# EAGLE board controller testjig (EAGLE 7.1.0)
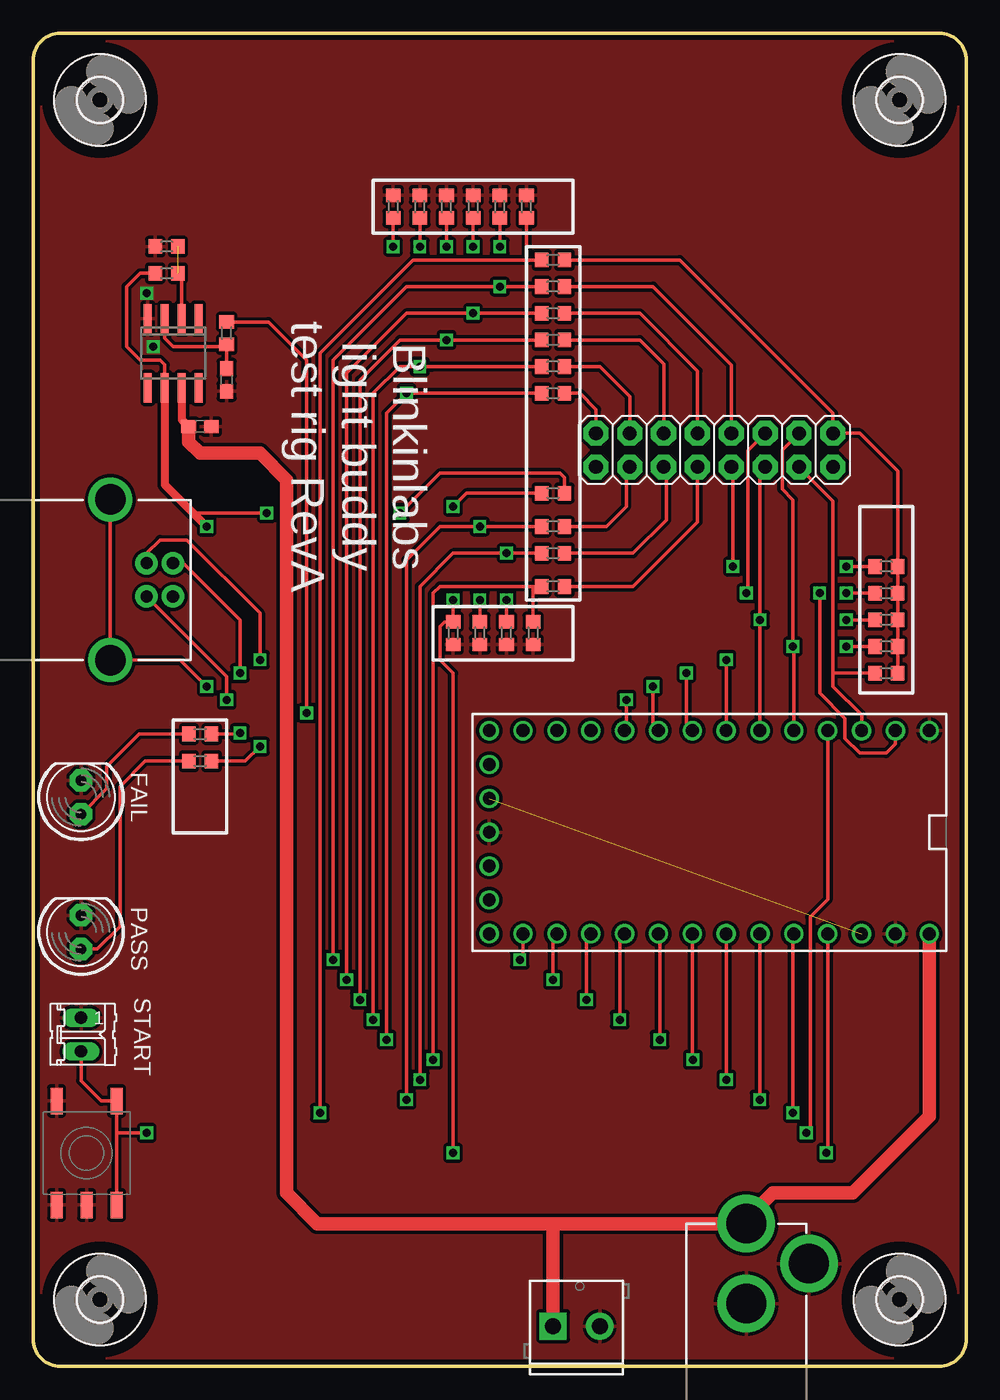
[diagram p0: board, top side]
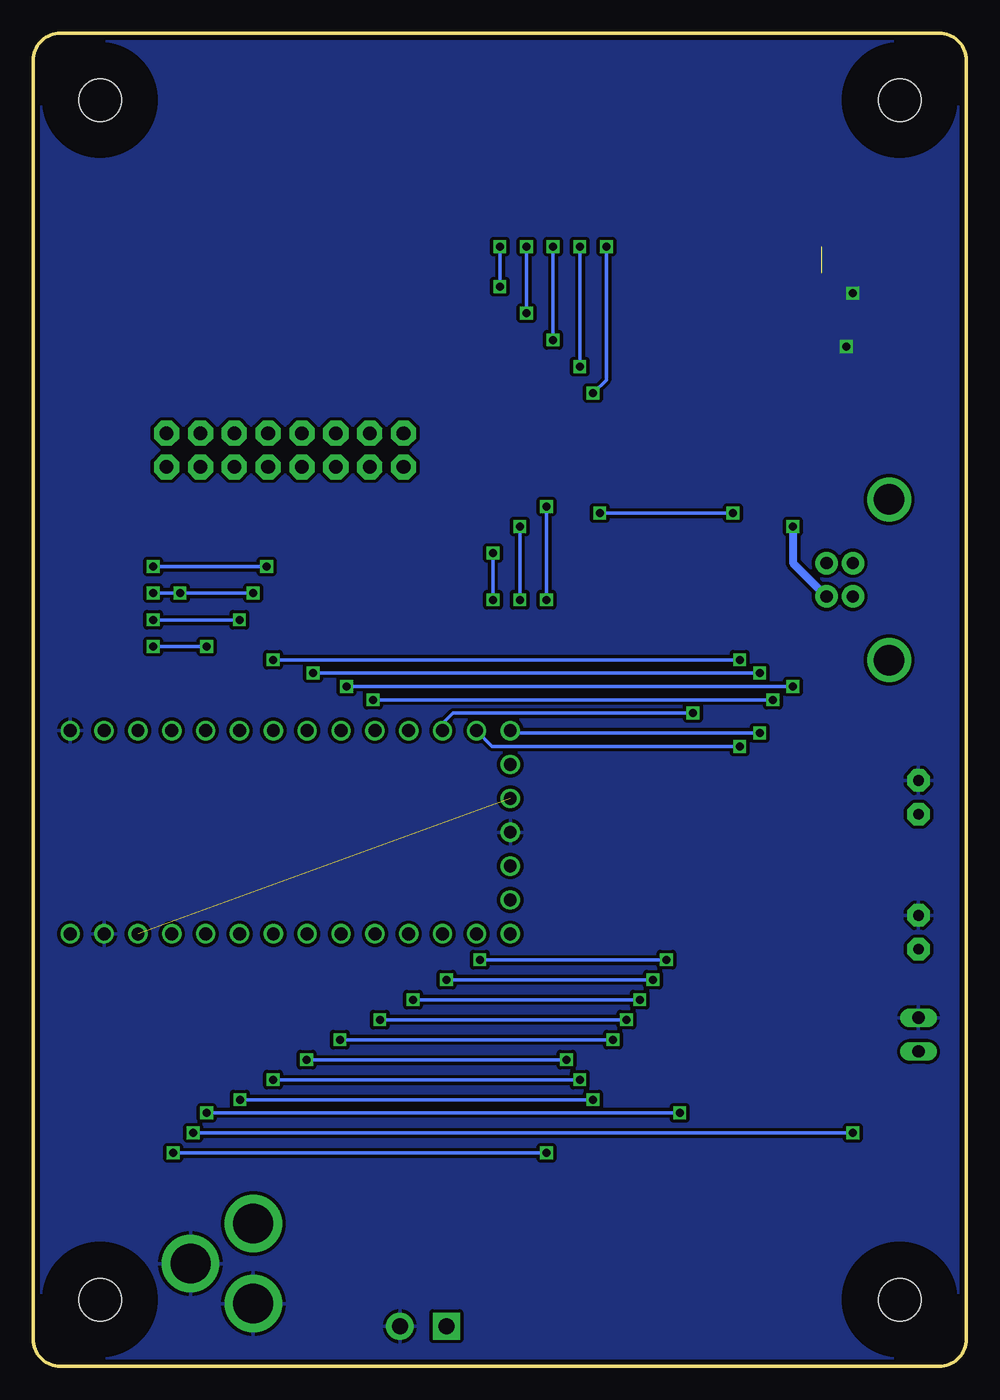
[diagram p1: board, bottom side, seen from below]

Size 70 x 100 mm. Coordinates in mm from the lower left corner, seen from the top.
Outline: 0,98 0,2 arc90 2,0 68,0 arc90 70,2 70,98 arc90 68,100 2,100 arc90 0,98
Copper layers (1*16): Top 0.0356mm / dielectric 1.5011mm / Bottom 0.0356mm
Design rules "BlinkyTape": minimum track width 8mil, minimum drill 10mil, track to track 8mil, track to pad 8mil, pad to pad 8mil, via to via 8mil, smd to smd 8mil, copper to edge 15mil, drill to drill 0.25mm, minimum pad ring 7mil, minimum via ring 7mil, stop-mask expansion 2mil, vias tented up to drill 10mil, thermal gap 10mil

## Footprints (pad centres in the part's own frame; a part is rotated, then mirrored left to right if it is on the bottom)
C0603 = smd 1.1 x 1: 1 -0.85,0; 2 0.85,0
LED5MM = drill 0.813 pad 1.676 octagon: A -1.27,0; K 1.27,0
3,2 = hole 3.2: 0,0
SO8 = smd 0.6 x 2.2: 1 -1.905,-2.6; 2 -0.635,-2.6; 3 0.635,-2.6; 4 1.905,-2.6; 5 1.905,2.6; 6 0.635,2.6; 7 -0.635,2.6; 8 -1.905,2.6
POWER_JACK_PTH = drill 2.997 pad 4.318: GND 0,7.7; GNDBREAK 4.7,10.7; PWR 0,13.7
SCREWTERMINAL-3.5MM-2 = drill 1.2 pad 2.032 square: 1 0,0 | drill 1.2 pad 2.032: 2 3.5,0
R0603 = smd 1 x 1.1: 1 -0.85,0; 2 0.85,0
02P = drill 0.914 long: 1 -1.27,0; 2 1.27,0
TD-07XB = smd 2 x 0.9: 1 -3.9,-2.25; 2 3.9,-2.25; 3 -3.9,2.25; 4 3.9,2.25; 5 -3.9,0
TEENSY_3.0_BASIC = drill 0.965: 0 -7.62,13.97; 1 -7.62,11.43; 2 -7.62,8.89; 3 -7.62,6.35; 3.3V 7.62,11.43; 3.3V1 -2.54,-16.51; 4 -7.62,3.81; 5 -7.62,1.27; 6 -7.62,-1.27; 7 -7.62,-3.81; 8 -7.62,-6.35; 9 -7.62,-8.89; 10 -7.62,-11.43; 11 -7.62,-13.97; 12 -7.62,-16.51; 13 7.62,-16.51; 14/A0 7.62,-13.97; 15/A1 7.62,-11.43; 16/A2 7.62,-8.89; 17/A3 7.62,-6.35; 18/A4 7.62,-3.81; 19/A5 7.62,-1.27; 20/A6 7.62,1.27; 21/A7 7.62,3.81; 22/A8 7.62,6.35; 23/A9 7.62,8.89; AGND 7.62,13.97; GND -7.62,16.51; GND1 0,-16.51; PGM 2.54,-16.51; RESET 5.08,-16.51; VBAT -5.08,-16.51; VIN 7.62,16.51
2X8 = drill 1.016 pad 1.88 octagon: 1 0,0; 2 0,2.54; 3 2.54,0; 4 2.54,2.54; 5 5.08,0; 6 5.08,2.54; 7 7.62,0; 8 7.62,2.54; 9 10.16,0; 10 10.16,2.54; 11 12.7,0; 12 12.7,2.54; 13 15.24,0; 14 15.24,2.54; 15 17.78,0; 16 17.78,2.54
USB-B-PTH = drill 0.914 pad 1.676: D+ 0,1.25; D- 1.981,1.25; GND 0,-1.25; VBUS 1.981,-1.25 | drill 2.286: S1 -2.718,-6.02; S2 -2.718,6.02

## Placement (x,y rotation side)
C1  .1uF  [C0603]  14.5,74 270 top
C2  .1uF  [C0603]  12.5,70.5 0 top
FAIL  RED  [LED5MM]  3.58,42.68 90 top
H1  MOUNT-HOLE3.2  [3,2]  5,5 0 top
H2  MOUNT-HOLE3.2  [3,2]  5,95 0 top
H3  MOUNT-HOLE3.2  [3,2]  65,95 0 top
H4  MOUNT-HOLE3.2  [3,2]  65,5 0 top
IC1  AD8041R  [SO8]  10.5,76 180 top
J1  POWER_JACKPTH  [POWER_JACK_PTH]  53.5,-3 0 top
JP1  [SCREWTERMINAL-3.5MM-2]  39,3 0 top
PASS  GREEN  [LED5MM]  3.58,32.56 90 top
R1  10k  [R0603]  64,54 180 top
R2  10k  [R0603]  64,58 180 top
R3  10k  [R0603]  64,52 180 top
R4  10k  [R0603]  64,56 180 top
R5  10k  [R0603]  64,60 180 top
R6  1k  [R0603]  31,87 90 top
R7  1k  [R0603]  33,87 90 top
R8  1k  [R0603]  35,87 90 top
R9  6.8k  [R0603]  39,81 0 top
R10  6.8k  [R0603]  39,79 0 top
R11  6.8k  [R0603]  39,77 0 top
R12  1k  [R0603]  37.5,55 270 top
R13  6.8k  [R0603]  39,58.5 180 top
R14  1k  [R0603]  29,87 90 top
R15  1k  [R0603]  27,87 90 top
R16  6.8k  [R0603]  39,75 0 top
R17  6.8k  [R0603]  39,73 0 top
R18  1k  [R0603]  33.5,55 270 top
R19  6.8k  [R0603]  39,63 180 top
R20  6.8k  [R0603]  39,61 180 top
R21  6.8k  [R0603]  39,65.5 180 top
R22  1k  [R0603]  31.5,55 270 top
R23  1k  [R0603]  35.5,55 270 top
R24  6.8k  [R0603]  39,83 0 top
R25  1k  [R0603]  37,87 90 top
R26  68k  [R0603]  10,82 180 top
R27  68k  [R0603]  10,84 0 top
R28  68k  [R0603]  14.5,77.5 270 top
R33  330  [R0603]  12.52,45.39 0 top
R34  330  [R0603]  12.52,47.43 0 top
START  [02P]  3.58,24.88 270 top
SW2  BUTTON_2  [TD-07XB]  4,16 90 top
U$1  TEENSY_3.0_BASIC  [TEENSY_3.0_BASIC]  50.72,40.06 270 top
U$2  M08X2  [2X8]  60,70 180 top
U$3  USB+SHIELD  [USB-B-PTH]  8.5,59 0 top

## Library data of the parts
C1 C2 FAIL PASS R1-R28 R33 R34 = adafruit
H1-H4 = holes
IC1 = analog-devices; MF: ALTERA CORPORATION; MPN: AD8041ARZ; OC_FARNELL: 1464831; OC_NEWARK: 88H0130
J1 JP1 U$2 U$3 = SparkFun-Connectors
START = con-amp-quick; OC_FARNELL: unknown; OC_NEWARK: unknown
SW2 = blinkinlabs
U$1 = Teensy3.0

## Nets
3.3V: U$1.3.3V U$1.3.3V1
+5V: C2.1 IC1.7 J1.PWR JP1.1 U$1.VIN
FAIL_LED: R34.2 U$1.12
GND: C1.2 C2.2 FAIL.K IC1.4 J1.GND J1.GNDBREAK JP1.2 PASS.K R6.2 R7.2 R8.2 R12.2 R14.2 R15.2 R18.2 R22.2 R23.2 R25.2 R27.1 START.1 SW2.3 SW2.4 SW2.5 U$1.AGND U$1.GND U$1.GND1
GOOD: PASS.A R33.1
N$1: IC1.2 R26.1 R27.2
N$3: C1.1 IC1.3 R28.2
N$24: R20.1 U$2.12
N$52: FAIL.A R34.1
PASS_LED: R33.2 U$1.11
START_SW: START.2 SW2.1 SW2.2 U$1.2
TARGET_3V3: R1.1 R2.1 R3.1 R4.1 R5.1 R24.2 U$2.1
TARGET_3V3_MEAS: R24.1 R25.1 U$1.22/A8
TARGET_GND: U$2.2
TARGET_LED_5V: R16.2 U$2.13
TARGET_LED_5V_MEAS: R14.1 R16.1 U$1.17/A3
TARGET_LED_ADDR: R17.2 U$2.15
TARGET_LED_ADDR_MEAS: R15.1 R17.1 U$1.18/A4
TARGET_LED_DATA: R19.1 U$2.14
TARGET_LED_DATA_MEAS: R18.1 R19.2 U$1.21/A7
TARGET_OUT_6: R20.2 R23.1 U$1.20/A6
TARGET_PA4: R9.2 U$2.7
TARGET_PA4_MEAS: R8.1 R9.1 U$1.14/A0
TARGET_PB0: R10.2 U$2.9
TARGET_PB0_MEAS: R7.1 R10.1 U$1.15/A1
TARGET_PB1: R13.1 U$2.10
TARGET_PB1_MEAS: R12.1 R13.2 U$1.19/A5
TARGET_PC1: R11.2 U$2.11
TARGET_PC1_MEAS: R6.1 R11.1 U$1.16/A2
TARGET_POWER_EN: R28.1 U$1.10
TARGET_RESET: R5.2 U$2.8
TARGET_RX: R3.2 U$1.1 U$2.4
TARGET_TCLK: R1.2 U$1.3 U$2.3
TARGET_TMS: R4.2 U$1.4 U$2.6
TARGET_TX: R2.2 U$1.0 U$2.5
TARGET_USB_D+: U$1.6 U$3.D-
TARGET_USB_D-: U$1.5 U$3.D+
TARGET_USB_GND: U$1.8 U$3.GND
TARGET_USB_SHIELD: U$1.7 U$3.S1 U$3.S2
TARGET_VUSB: IC1.6 R21.1 R26.2 U$3.VBUS
TARGET_VUSB_MEAS: R21.2 R22.1 U$1.23/A9
VBAT: U$1.VBAT

## Tracks (layer width: path | path; a pad name or v marks a point on that pad's centre or on a via)
3.3V  (1 unrouted)
+5V
  Top 0.61: IC1.7 11.13,71.02 C2.1
  Top 1.016: U$1.VIN 67.23,18.73 61.5,13 55.5,13 53.5,11 J1.PWR 39,10.7 | 39,10.7 21.3,10.7 19,13 19,66.5 17,68.5 12.5,68.5 11.65,69.35 C2.1 | JP1.1 39,10.7
FAIL_LED  (via drill 0.6)
  Top 0.254: R34.2 15.43,47.43 v15.5,47.5
  Bottom 0.254: v15.5,47.5 34.03,47.5 U$1.12
GND  (via drill 0.6)
  other vias: 8.5,80.5 9,76.5
  pour Top (isolate 0.254): 0,100 70,100 70,0 0,0
  pour Bottom (isolate 0.254): 0,100 0,0 70,0 70,100
GOOD
  Top 0.254: PASS.A 4.79,31.29 6.5,33 6.5,43.5 8.39,45.39 R33.1
N$1  (1 unrouted)
  Top 0.254: IC1.2 11.13,81.72 R26.1
N$3
  Top 0.254: IC1.3 9.87,77.14 10.5,76.5 14.35,76.5 R28.2 C1.1
N$24
  Top 0.254: U$2.12 47.5,67.26 47.5,63.5 45,61 R20.1
N$52
  Top 0.254: R34.1 7.93,47.43 5.5,45 5.5,43.33 FAIL.A
PASS_LED  (via drill 0.6)
  Top 0.254: R33.2 15.89,45.39 v17,46.5
  Bottom 0.254: v17,46.5 35.57,46.5 U$1.11
START_SW  (via drill 0.6)
  Top 0.254: U$1.2 59.61,35.01 58.3,33.7 58.3,17.8 v58,17.5 | v8.5,17.5 6.25,17.5 | START.2 3.58,21.42 5.1,19.9 SW2.2 6.25,17.5 | SW2.1 6.25,17.5
  Bottom 0.254: v58,17.5 v8.5,17.5
TARGET_3V3
  Top 0.254: R3.1 R1.1 R4.1 R2.1 R5.1 64.85,67.15 62,70 U$2.1 60,71.5 48.5,83 R24.2
TARGET_3V3_MEAS  (via drill 0.6)
  Top 0.254: R24.1 37,83 | 37,83 28.5,83 21.5,76 v21.5,19 | v57,19 57,32.37 U$1.22/A8 | R25.1 37,83
  Bottom 0.254: v21.5,19 v57,19
TARGET_LED_5V
  Top 0.254: R16.2 42.5,75 44.76,72.74 U$2.13
TARGET_LED_5V_MEAS  (via drill 0.6)
  Top 0.254: R16.1 30,75 v29,75 27.5,75 25.5,73 v25.5,26 | v44,26 44,32.07 U$1.17/A3 | R14.1 v29,84
  Bottom 0.254: v25.5,26 v44,26 | v29,84 v29,75
TARGET_LED_ADDR
  Top 0.254: R17.2 41,73 42.22,71.78 U$2.15
TARGET_LED_ADDR_MEAS  (via drill 0.6)
  Top 0.254: R17.1 28.5,73 v28,73 26.5,71.5 v26.5,24.5 | v47,24.5 47,32.35 U$1.18/A4 | R15.1 v27,84
  Bottom 0.254: v26.5,24.5 v47,24.5 | v27,84 27,74 v28,73
TARGET_LED_DATA
  Top 0.254: U$2.14 44.5,67.2 44.5,64.5 43,63 R19.1
TARGET_LED_DATA_MEAS  (via drill 0.6)
  Top 0.254: 38,63 R19.2 34.5,63 v33.5,63 30.5,63 28,60.5 v28,20 | v54.5,20 54.5,32.41 U$1.21/A7 | R18.1 v33.5,57.5
  Bottom 0.254: v28,20 v54.5,20 | v33.5,57.5 v33.5,63
TARGET_OUT_6  (via drill 0.6)
  Top 0.254: U$1.20/A6 v51.99,21.51 v52,21.5 | v29,21.5 29,58.5 31.5,61 v35.5,61 36,61 R20.2 | R23.1 v35.5,57.5
  Bottom 0.254: v52,21.5 v29,21.5 | v35.5,57.5 v35.5,61
TARGET_PA4
  Top 0.254: U$2.7 52.38,75.12 46.5,81 R9.2
TARGET_PA4_MEAS  (via drill 0.6)
  Top 0.254: R9.1 v35,81 34.5,81 28,81 22.5,75.5 v22.5,30.5 | U$1.14/A0 36.75,30.75 v36.5,30.5 | R8.1 v35,84
  Bottom 0.254: v36.5,30.5 v22.5,30.5 | v35,84 v35,81
TARGET_PB0
  Top 0.254: R10.2 45.5,79 49.84,74.66 U$2.9
TARGET_PB0_MEAS  (via drill 0.6)
  Top 0.254: R10.1 v33,79 32.5,79 28,79 23.5,74.5 v23.5,29 | v39,29 39,32.15 U$1.15/A1 | R7.1 v33,84
  Bottom 0.254: v23.5,29 v39,29 | v33,84 v33,79
TARGET_PB1
  Top 0.254: U$2.10 49.84,63.34 45,58.5 R13.1
TARGET_PB1_MEAS  (via drill 0.6)
  Top 0.254: U$1.19/A5 49.45,23.05 v49.5,23 | v30,23 30,58 30.5,58.5 37.5,58.5 | R13.2 37.5,58.5 | R12.1 37.5,58.5
  Bottom 0.254: v49.5,23 v30,23
TARGET_PC1
  Top 0.254: R11.2 45.5,77 47.3,75.2 U$2.11
TARGET_PC1_MEAS  (via drill 0.6)
  Top 0.254: R11.1 v31,77 30.5,77 27.5,77 24.5,74 v24.5,27.5 | v41.5,27.5 41.5,32.11 U$1.16/A2 | R6.1 v31,84
  Bottom 0.254: v24.5,27.5 v41.5,27.5 | v31,84 v31,77
TARGET_POWER_EN  (via drill 0.6)
  Top 0.254: v20.5,49 20.5,75.5 17.65,78.35 R28.1
  Bottom 0.254: U$1.10 39.29,48.21 38.5,49 v20.5,49
TARGET_RESET  (via drill 0.6)
  Top 0.254: R5.2 v61,60 | v52.5,60 52.5,67.24 52.38,67.36 U$2.8
  Bottom 0.254: v61,60 v52.5,60
TARGET_RX
  Top 0.254: 60,52 R3.2 | U$1.1 62.15,48.85 60,51 60,52 | 60,52 60,64.92 U$2.4
TARGET_TCLK  (via drill 0.6)
  Top 0.254: U$1.3 57.07,53.93 v57,54 57,65 56.2,65.8 56.2,68.74 U$2.3 | R1.2 v61,54
  Bottom 0.254: v61,54 v57,54
TARGET_TMS  (via drill 0.6)
  Top 0.254: U$1.4 v54.53,56 54.53,67.07 U$2.6 | R4.2 v61,56
  Bottom 0.254: v61,56 v54.53,56
TARGET_TX  (via drill 0.6)
  Top 0.254: U$1.0 64.69,46.69 64,46 62,46 60.9,47.1 60.9,48.6 59,50.5 v59,58 | v61,58 R2.2 | v53.5,58 53.6,58 53.6,68.68 U$2.5
  Bottom 0.254: v61,58 v59,58 v53.5,58
TARGET_USB_D+  (via drill 0.6)
  Top 0.254: v49,52 49,48.13 U$1.6 | U$3.D- 11.25,60.25 15.5,56 v15.5,52
  Bottom 0.254: v15.5,52 v49,52
TARGET_USB_D-  (via drill 0.6)
  Top 0.254: v52,53 U$1.5 | U$3.D+ 8.5,61 9.5,62 11.5,62 17,56.5 v17,53
  Bottom 0.254: v52,53 18,53 v17,53
TARGET_USB_GND  (via drill 0.6)
  Top 0.254: v44.5,50 44.5,47.81 U$1.8 | v14.5,50 14.5,51.75 U$3.GND
  Bottom 0.254: v14.5,50 v44.5,50
TARGET_USB_SHIELD  (via drill 0.6)
  Top 0.254: v46.5,51 46.5,48.09 U$1.7 | U$3.S2 U$3.S1 11.02,52.98 v13,51
  Bottom 0.254: v13,51 v46.5,51
TARGET_VUSB  (via drill 0.6)
  Top 0.254: IC1.6 9.87,75.14 9.5,75.5 8,75.5 7,76.5 7,81 8,82 R26.2 | R21.1 39.85,66.65 39.5,67 30.5,67 v27.5,64 | v17.5,64 12,64
  Top 0.61: IC1.6 9.87,66.14 12,64 v13,63
  Bottom 0.254: v27.5,64 v17.5,64
  Bottom 0.61: v13,63 13,60.27 U$3.VBUS
TARGET_VUSB_MEAS  (via drill 0.6)
  Top 0.254: U$1.23/A9 59.61,16.11 v59.5,16 | v31.5,16 31.5,52 30.5,53 30.5,55.5 30.85,55.85 R22.1 v31.5,57.5 | R21.2 32.5,65.5 v31.5,64.5
  Bottom 0.254: v59.5,16 v31.5,16 | v31.5,64.5 v31.5,57.5

## Text on the board
tNames: Blinkinlabs / light buddy / test rig RevA
tDocu: 1k | ADDR | 5V_O | PC1 | PB0 | PA4 | TX | TCLK | 3.3V | 6.8k | DATA | ? | PB1 | RST | TMS | RX | GND | 10k | 1k | 330 | TEEEEEEEE / EEENSY3.0 | + -